# Altium PCB LIMIT_SW_Breakout.pcbdoc (part 5 of 5)
Units mm, origin at the board's own origin, x right, y up, seen from the top; angles counter-clockwise.
Board outline 23.88 x 98.5 mm, 2 copper layers (Top Layer, Bottom Layer), stack 0.533 mm thick; 22 components, 15 nets, 4975 pads, 0 vias.
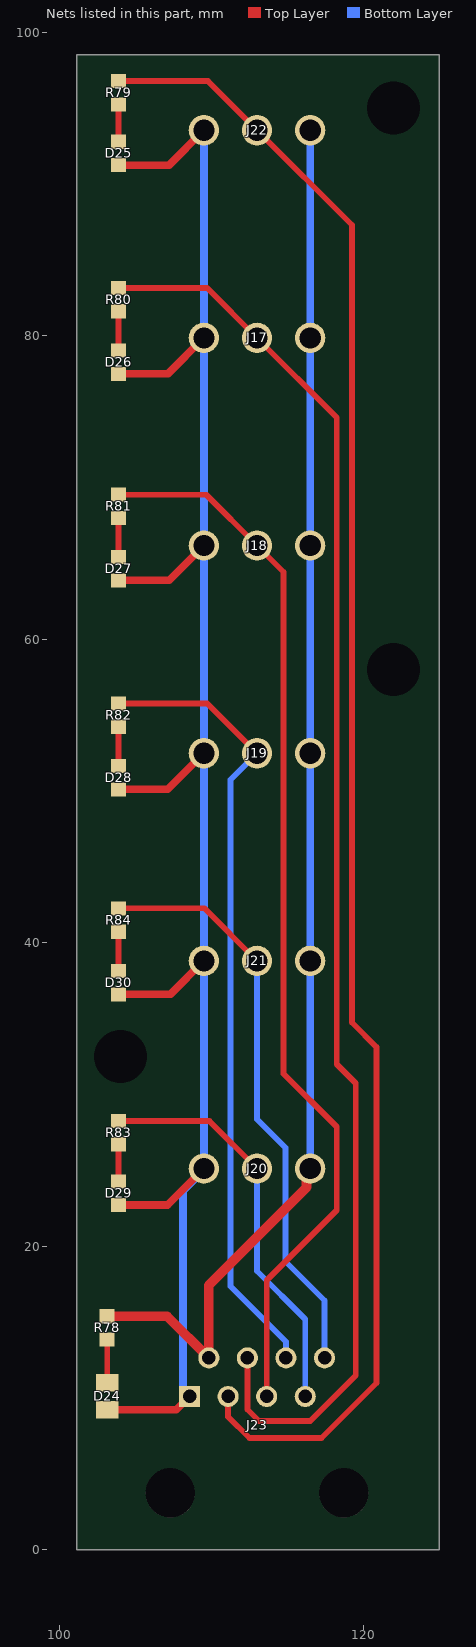
[diagram p5: the nets of this part, all layers, seen from the top]

## Footprints (in the part's own frame and the unit in brackets; to place one, negate y for a bottom-side part, rotate by r counter-clockwise, add the part's x,y. Pads: shape width x height; smd on the part's side, far side on the other; paste and mask are expansions set on the pad) (continued)
Expatria-Logo [mil] "Expatria DXF logo" (continued)
  round 1.64 on Mech4: 1(-44059.07,43534.74) 1(-44059.07,43705.17) 1(-44059.07,43705.17) 1(-44058.19,43687.28) 1(-44058.19,43687.28) 1(-44057.74,43705.63) 1(-44057.74,43705.63) 1(-44057.29,43510.14) 1(-44057.29,43510.14) 1(-44057.29,43687.28) 1(-44057.29,43687.28) 1(-44056.84,43533.42) 1(-44056.84,43533.42) 1(-44055.96,43707.41) 1(-44055.96,43707.41) 1(-44054.6,43532.96) 1(-44054.6,43532.96) 1(-44054.6,43707.86) 1(-44054.6,43707.86) 1(-44054.14,43509.72) 1(-44054.14,43509.72) 1(-44054.14,43708.77) 1(-44054.14,43708.77) 1(-44053.27,43691.75) 1(-44053.27,43691.75) 1(-44052.82,43709.19) 1(-44052.82,43709.19) 1(-44052.36,43531.63) 1(-44052.36,43531.63) 1(-44052.36,43691.75) 1(-44052.36,43691.75) 1(-44052.36,43710.1) 1(-44052.36,43710.1) 1(-44051.03,43508.36) 1(-44051.03,43508.36) 1(-44051.03,43710.55) 1(-44051.03,43710.55) 1(-44050.12,43531.18) 1(-44050.12,43531.18) 1(-44049.25,43712.34) 1(-44049.25,43712.34) 1(-44047.89,43529.85) 1(-44047.89,43529.85) 1(-44047.89,43712.79) 1(-44047.89,43712.79) 1(-44047.43,43713.66) 1(-44047.43,43713.66) 1(-44046.1,43507.49) 1(-44046.1,43507.49) 1(-44046.1,43714.12) 1(-44046.1,43714.12) 1(-44045.65,43529.4) 1(-44045.65,43529.4) 1(-44044.78,43699.83) 1(-44044.78,43699.83) 1(-44044.33,43715.9) 1(-44044.33,43715.9) 1(-44043.87,43699.83) 1(-44043.87,43699.83) 1(-44043.41,43528.04) 1(-44043.41,43528.04) 1(-44042.96,43506.13) 1(-44042.96,43506.13) 1(-44042.96,43716.35) 1(-44042.96,43716.35) 1(-44042.09,43717.72) 1(-44042.09,43717.72) 1(-44041.18,43527.62) 1(-44041.18,43527.62) 1(-44040.73,43718.14) 1(-44040.73,43718.14) 1(-44040.31,43719.05) 1(-44040.31,43719.05) 1(-44039.85,43505.67) 1(-44039.85,43505.67) 1(-44038.94,43526.25) 1(-44038.94,43526.25) 1(-44038.94,43719.5) 1(-44038.94,43719.5) 1(-44038.07,43720.83) 1(-44038.07,43720.83) 1(-44037.62,43706.54) 1(-44037.62,43706.54) 1(-44036.71,43504.34) 1(-44036.71,43504.34) 1(-44036.71,43525.8) 1(-44036.71,43525.8) 1(-44036.71,43706.54) 1(-44036.71,43706.54) 1(-44036.71,43721.28) 1(-44036.71,43721.28) 1(-44036.25,43722.19) 1(-44036.25,43722.19) 1(-44034.92,43722.61) 1(-44034.92,43722.61) 1(-44034.47,43723.52) 1(-44034.47,43723.52) 1(-44034.01,43709.65) 1(-44034.01,43709.65) 1(-44033.6,43503.89) 1(-44033.6,43503.89) 1(-44033.14,43709.65) 1(-44033.14,43709.65) 1(-44033.14,43723.97) 1(-44033.14,43723.97) 1(-44033.14,43524.02) 1(-44033.14,43524.02) 1(-44032.69,43724.85) 1(-44032.69,43724.85) 1(-44031.36,43725.3) 1(-44031.36,43725.3) 1(-44030.9,43523.56) 1(-44030.9,43523.56) 1(-44029.54,43727.08) 1(-44029.54,43727.08) 1(-44028.67,43502.11) 1(-44028.67,43502.11) 1(-44028.67,43522.23) 1(-44028.67,43522.23) 1(-44028.21,43727.54) 1(-44028.21,43727.54) 1(-44026.43,43521.78) 1(-44026.43,43521.78) 1(-44026.43,43729.32) 1(-44026.43,43729.32) 1(-44025.53,43501.65) 1(-44025.53,43501.65) 1(-44025.07,43729.77) 1(-44025.07,43729.77) 1(-44024.65,43730.68) 1(-44024.65,43730.68) 1(-44024.2,43520.45) 1(-44024.2,43520.45) 1(-44023.74,43719.5) 1(-44023.74,43719.5) 1(-44023.28,43731.14) 1(-44023.28,43731.14) 1(-44022.83,43719.5) 1(-44022.83,43719.5) 1(-44021.96,43520) 1(-44021.96,43520) 1(-44021.51,43732.92) 1(-44021.51,43732.92) 1(-44021.05,43519.09) 1(-44021.05,43519.09) 1(-44020.18,43722.61) 1(-44020.18,43722.61) 1(-44019.27,43722.61) 1(-44019.27,43722.61) 1(-44018.81,43518.67) 1(-44018.81,43518.67) 1(-44018.36,43734.25) 1(-44018.36,43734.25) 1(-44017.03,43735.61) 1(-44017.03,43735.61) 1(-44016.58,43517.31) 1(-44016.58,43517.31) 1(-44015.7,43736.03) 1(-44015.7,43736.03) 1(-44015.25,43727.08) 1(-44015.25,43727.08) 1(-44014.79,43498.96) 1(-44014.79,43498.96) 1(-44014.79,43737.39) 1(-44014.79,43737.39) 1(-44014.34,43516.85) 1(-44014.34,43516.85) 1(-44014.34,43727.08) 1(-44014.34,43727.08) 1(-44011.65,43739.17) 1(-44011.65,43739.17) 1(-44010.78,43497.18) 1(-44010.78,43497.18) 1(-44010.78,43515.07) 1(-44010.78,43515.07) 1(-44010.78,43731.14) 1(-44010.78,43731.14) 1(-44009.87,43731.14) 1(-44009.87,43731.14) 1(-44009.87,43735.61) 1(-44009.87,43735.61) 1(-44009.42,43732.92) 1(-44009.42,43732.92) 1(-44009.42,43735.61) 1(-44009.42,43735.61) 1(-44009.42,43732.47) 1(-44009.42,43732.47) 1(-44009,43733.37) 1(-44009,43733.37) 1(-44009,43738.72) 1(-44009,43738.72) 1(-44008.54,43514.62) 1(-44008.54,43514.62) 1(-44008.54,43732.47) 1(-44008.54,43732.47) 1(-44008.54,43738.72) 1(-44008.54,43738.72) 1(-44008.08,43740.08) 1(-44008.08,43740.08) 1(-44006.3,43513.29) 1(-44006.3,43513.29) 1(-44004.07,43512.83) 1(-44004.07,43512.83) 1(-44003.16,43511.96) 1(-44003.16,43511.96) 1(-44002.29,43495.85) 1(-44002.29,43495.85) 1(-44000.92,43494.94) 1(-44000.92,43494.94) 1(-44000.92,43511.51) 1(-44000.92,43511.51) 1(-43997.81,43494.49) 1(-43997.81,43494.49) 1(-43997.81,43509.72) 1(-43997.81,43509.72) 1(-43995.57,43509.27) 1(-43995.57,43509.27) 1(-43993.76,43507.91) 1(-43993.76,43507.91) 1(-43991.52,43507.49) 1(-43991.52,43507.49) 1(-43990.65,43506.58) 1(-43990.65,43506.58) 1(-43988.41,43506.13) 1(-43988.41,43506.13) 1(-43986.18,43504.8) 1(-43986.18,43504.8) 1(-43983.94,43504.34) 1(-43983.94,43504.34) 1(-43981.25,43490.47) 1(-43981.25,43490.47) 1(-43976.77,43500.32) 1(-43976.77,43500.32) 1(-43974.54,43499.87) 1(-43974.54,43499.87) 1(-43973.63,43498.96) 1(-43973.63,43498.96) 1(-43971.39,43498.54) 1(-43971.39,43498.54) 1(-43968.74,43487.36) 1(-43968.74,43487.36) 1(-43967.83,43496.31) 1(-43967.83,43496.31) 1(-43964.68,43495.4) 1(-43964.68,43495.4) 1(-43961.57,43493.16) 1(-43961.57,43493.16) 1(-43957.55,43486) 1(-43957.55,43486) 1(-43957.55,43491.38) 1(-43957.55,43491.38) 1(-43954.87,43488.69) 1(-43954.87,43488.69) 1(-43954.41,43486.91) 1(-43954.41,43486.91)
FP-5555799-1-MFG [mm]
  rect 1.39x1.39 hole 0.89 paste-1000 mask+0: 1(-4.445,4.64)
  round 1.39 hole 0.89 paste-1000 mask+0: 2(-3.175,7.18) 3(-1.905,4.64) 4(-0.635,7.18) 5(0.635,4.64) 6(1.905,7.18) 7(3.175,4.64) 8(4.445,7.18)
  round 3.25 hole 3.25 unplated paste-1000 mask+0: ""(-5.715,-1.71) ""(5.715,-1.71)
  silkscreen extent -7.88,-8.32 7.88,8.96, body extent -7.98,-8.42 7.98,8.42, height 0.25
SL_3_50_180G_03 [mm] "OMNIMATE Signal - Serie BL/SL 3.50  SL 3.50/03/180G 3.2"
  round 2 hole 1.4: A1(-3.5,-0.22) A2(0,-0.22) A3(3.5,-0.22)
  silkscreen extent -5.95,-3.73 5.95,3.73, body extent -5.95,-3.02 5.95,4.18, height 9.3

## Part data
D24: library part "0805 LED Green", "LED", Color=Green, Package=0805, SuppliersPartNumber=C2297, Supplier=LC
D25 D26 D27 D28: library part "0603 LED Yellow", "LED", Color=Yellow, Package=0603, SuppliersPartNumber=C72038, Supplier=LC
D29 D30: library part "0603 LED White", "LED", Color=White, Package=0603, SuppliersPartNumber=C2290, Supplier=LC
J17 J18 J19 J20 J21 J22: library part CMP-1559-00904-1, "Header,Male Pin,Covered(4 Sided) 3 1 0.138\"（3.50mm） 3 P=3.5mm Pluggable System Terminal Block RoHS", Manufacturer="Ningbo Kangnex Elec", PartNumber=WJ15EDGVC-3.5-3P, SuppliersPartNumber=C192778, UL_94_flammability_rating=V-0, PackageReference=SL_3_50_180G_03, Packaging=Box, Pitch_inch="0.138 inch", Pitch_mm="3.5 mm", Revision=V1, Short_text_for_material="SL 3.50/03/180G 3.2SN OR BX", Side_termination_characteristic="closed side", Solder_pin_length_mm="3.2 mm"
J23: library part CMP-03371-000003-1, "CONN MOD JACK 8P8C VERT UNSHLD", Manufacturer="TE Connectivity", SuppliersPartNumber=C305983, Temperature="-40°C to +85°C", Temperature Range High=+85°C, Temperature Range Low=-40°C, Device Class L1=Connectors, Device Class L2="Modular / Ethernet Connectors", Device Class L3=unset, Digikey Description="CONN MOD JACK 8P8C VERT UNSHLD", Is Female=yes, Manufacturer Part Number=5555799-1, Mouser Description="Conn RJ-45 F 8 POS 2.54mm Solder ST Thru-Hole 8 Terminal 1 Port Cat 3 Box/Package/Tray", Number of Contacts=8, Octopart=https://octopart.com/5555799-1-te+connectivity-39526335, Package=5555799-1, Pitch=2.54mm
Logo1: library part SBT-Logo, Manufacturer 1=NONE, Manufacturer Part Number 1=NONE
R78: library part "0603 10K (1002) 1%", "Chip resistor", Manufacturer="Uniroyal Elec", Package=0603, PartNumber=0603WAF1002T5E, Power=1/10W, Resistance=10KΩ, SuppliersPartNumber=C25804, Tolerance=1%, ComponentLink1Description="Supplier link", ComponentLink1URL=http://www.szlcsc.com/product/details_26547.html, Supplier=LC
R79 R80 R81 R82 R83 R84: library part "0603 2K (2001) 1%", "Chip resistor", Manufacturer="Uniroyal Elec", Package=0603, PartNumber=0603WAF2001T5E, Power=1/10W, Resistance=2KΩ, SuppliersPartNumber=C22975, Tolerance=1%, ComponentLink1Description="Supplier link", ComponentLink1URL=http://www.szlcsc.com/product/details_23702.html, Supplier=LC

## Free pads (board coordinates)
  round 0 hole 3.5 unplated: 0(104,32.5) 0(122,58) 0(122,95)

## Nets (pads, with @x,y where several pads share a name; then routed paths per layer and width w, separated by ;. In a path a pad name is that pad's centre, name@x,y a point inside that pad or via, vN(x,y) a via of type N, cw(c..) or ccw(c..) an arc to the next point about the centre after c; other vN are vias at no path point)
+12V_SWITCH: D24.A D25.A D26.A D27.A D28.A D29.A D30.A J17.A1 J18.A1 J19.A1 J20.A1 J21.A1 J22.A1 J23.1 | length 129.5
  Top Layer w0.508: D24.A@103.125,9.235 107.68,9.235 J23.1@108.555,10.11 ; D29.A@103.875,22.73 107.105,22.73 J20.A1@109.5,25.125 ; D30.A@103.875,36.605 107.299,36.605 J21.A1@109.5,38.806 ; D28.A@103.875,50.105 107.118,50.105 J19.A1@109.5,52.487 ; D27.A@103.875,63.875 107.207,63.875 J18.A1@109.5,66.168 ; D26.A@103.875,77.48 107.131,77.48 J17.A1@109.5,79.849 ; D25.A@103.875,91.23 107.2,91.23 J22.A1@109.5,93.53
  Bottom Layer w0.508: J23.1@108.555,10.11 108.125,10.54 108.125,23.651 109.5,25.026 J20.A1@109.5,25.125 J21.A1@109.5,38.806 J19.A1@109.5,52.487 J18.A1@109.5,66.168 J17.A1@109.5,79.849 J22.A1@109.5,93.53
A_LIM_SWITCH: J19.A2 J23.6 R82.2 | length 52.6
  Top Layer w0.381: R82.2@103.875,55.77 109.717,55.77 J19.A2@113,52.487
  Bottom Layer w0.381: J19.A2@113,52.487 111.25,50.737 111.25,17.375 114.905,13.72 J23.6@114.905,12.65
GND_SWITCH: J17.A3 J18.A3 J19.A3 J20.A3 J21.A3 J22.A3 J23.2 R78.1 | length 91.5
  Top Layer w0.635: R78.1@103.125,15.395 107.08,15.395 J23.2@109.825,12.65 109.825,17.45 116.262,23.887 116.262,24.887 J20.A3@116.5,25.125
  Bottom Layer w0.508: J20.A3@116.5,25.125 J21.A3@116.5,38.806 J19.A3@116.5,52.487 J18.A3@116.5,66.168 J17.A3@116.5,79.849 J22.A3@116.5,93.53
NetD24_K: D24.K R78.2 | length 2.8
  Top Layer w0.381: D24.K@103.125,11.015 R78.2@103.125,13.855
NetD25_K: D25.K R79.1 | length 2.5
  Top Layer w0.381: D25.K@103.875,92.77 R79.1@103.875,95.23
NetD26_K: D26.K R80.1 | length 2.6
  Top Layer w0.381: D26.K@103.875,79.02 R80.1@103.875,81.605
NetD27_K: D27.K R81.1 | length 2.6
  Top Layer w0.381: D27.K@103.875,65.415 R81.1@103.875,67.98
NetD28_K: D28.K R82.1 | length 2.6
  Top Layer w0.381: D28.K@103.875,51.645 R82.1@103.875,54.23
NetD29_K: D29.K R83.1 | length 2.5
  Top Layer w0.381: D29.K@103.875,24.27 R83.1@103.875,26.73
NetD30_K: D30.K R84.1 | length 2.6
  Top Layer w0.381: D30.K@103.875,38.145 R84.1@103.875,40.73
PROBE_SWITCH: J21.A2 J23.8 R84.2 | length 38.6
  Top Layer w0.381: R84.2@103.875,42.27 109.536,42.27 J21.A2@113,38.806
  Bottom Layer w0.381: J21.A2@113,38.806 113,28.375 114.875,26.5 114.875,19 117.445,16.43 J23.8@117.445,12.65
TOOL_SWITCH: J20.A2 J23.7 R83.2 | length 26.8
  Top Layer w0.381: R83.2@103.875,28.27 103.895,28.25 109.875,28.25 J20.A2@113,25.125
  Bottom Layer w0.381: J20.A2@113,25.125 113,18.375 116.175,15.2 J23.7@116.175,10.11
X_LIM_SWITCH: J22.A2 J23.3 R79.2 | length 109.5
  Top Layer w0.381: R79.2@103.875,96.77 109.76,96.77 J22.A2@113,93.53 119.25,87.28 119.25,34.75 120.875,33.125 120.875,11 117.25,7.375 112.5,7.375 111.095,8.78 J23.3@111.095,10.11
Y_LIM_SWITCH: J17.A2 J23.4 R80.2 | length 93.6
  Top Layer w0.381: R80.2@103.875,83.145 109.704,83.145 J17.A2@113,79.849 118.25,74.599 118.25,32 119.5,30.75 119.5,11.5 116.5,8.5 113.125,8.5 112.365,9.26 J23.4@112.365,12.65
Z_LIM_SWITCH: J18.A2 J23.5 R81.2 | length 70.7
  Top Layer w0.381: R81.2@103.875,69.52 109.648,69.52 J18.A2@113,66.168 114.75,64.418 114.75,31.375 118.25,27.875 118.25,22.375 113.635,17.76 J23.5@113.635,10.11
pads on no net: J23. Logo1.1

## Polygon pours and split planes (outlines as drawn)
no net on Bottom Layer "NONET_L-01_P-001" (solid, pour order 0): 126.125,40.625 121.125,40.625 121.125,15.25 126.125,15.25

## Silkscreen, mask and mechanical layers (free items; w line width, h text height)
Top Overlay:
  lines w0.5: 101.375,0.25 124.75,0.25 124.75,98.25 101.375,98.25 101.375,0.25
  text "12V" at 105.5,96 h1.52 r270
  text "GND" at 119.21,92.833 h1.52 r315
  text "X AXIS" at 107,87.905 h2.54
  text "GND" at 116,87.125 h1.52 r270
  text "12V" at 108.75,87 h1.52 r270
  text "SIG" at 112.5,86.875 h1.52 r270
  text "Y AXIS" at 106.998,74.28 h2.54
  text "GND" at 116.213,73.266 h1.52 r270
  text "12V" at 108.963,73.141 h1.52 r270
  text "SIG" at 112.713,73.016 h1.52 r270
  text "Z AXIS" at 107,60.53 h2.54
  text "GND" at 116.088,59.516 h1.52 r270
  text "12V" at 108.838,59.391 h1.52 r270
  text "SIG" at 112.588,59.266 h1.52 r270
  text "A/Y2 AXIS" at 107,47.03 h2.54
  text "GND" at 116.088,45.891 h1.52 r270
  text "12V" at 108.838,45.766 h1.52 r270
  text "SIG" at 112.588,45.641 h1.52 r270
  text "PROBE" at 107,33.277 h2.54
  text "GND" at 116.088,32.141 h1.52 r270
  text "12V" at 108.838,32.016 h1.52 r270
  text "SIG" at 112.588,31.891 h1.52 r270
  text "TOOL" at 107,19.652 h2.54
  text "12V" at 106.609,15.463 h1.52
Bottom Overlay:
  drawing of 679 lines, arcs and shapes, not listed
  text "Expatria" at 121.473,86.341 h2.54
  text "Technologies" at 115.114,82.402 h1.52
  text "12V" at 107.116,-0.074 h1.52 r90
  text "12V" at 107.116,-0.074 h1.52 r90
Bottom Solder:
  region: 123.552,17.379 124.152,17.349 124.152,17.472 123.563,17.441 cw(c123.564,17.509) 123.496,17.498 cw(c123.649,17.504) 123.497,17.517 123.599,18.102 123.381,18.023 cw(c123.359,18.104) 123.366,18.021 cw(c123.366,18.065) 123.331,18.037 122.812,18.679 122.744,18.534 cw(c122.704,18.553) 122.704,18.509 cw(c122.704,18.553) 122.69,18.511 122.3,18.638 122.379,18.268 cw(c122.328,18.263) 122.353,18.218 122.184,18.147 122.494,17.858 cw(c122.463,17.826) 122.508,17.826 cw(c122.462,17.827) 122.469,17.782 cw(c122.474,18.128) 122.455,17.783 121.738,17.922 121.867,17.699 cw(c121.828,17.676) 121.873,17.676 cw(c121.828,17.676) 121.848,17.637 121.403,17.41 121.848,17.184 cw(c121.828,17.144) 121.873,17.144 cw(c121.828,17.144) 121.867,17.122 121.738,16.899 122.455,17.038 cw(c122.459,16.988) 122.507,17 cw(c122.457,16.997) 122.494,16.962 122.184,16.674 122.353,16.602 cw(c122.335,16.561) 122.38,16.561 122.3,16.183 122.69,16.31 cw(c122.704,16.267) 122.704,16.312 cw(c122.704,16.267) 122.744,16.286 122.812,16.142 123.331,16.784 cw(c123.366,16.756) 123.366,16.8 cw(c123.366,16.756) 123.381,16.797 123.599,16.718 123.497,17.304 cw(c123.776,17.328) 123.496,17.318 cw(c123.56,17.315)
  text "Designed in Canada" at 123.767,39.75 h2.54 r90
Mechanical 6:
  lines w0.5: 101.125,0 101.125,98.5 101.5,98.5 125,98.5 125,0 101.125,0
Mechanical 15:
  lines w0.254: 218.44,155.746 218.44,158.286 218.44,158.286